# Altium PCB DONGLE01.PcbDoc
Units mil, origin at the board's own origin, x right, y up, seen from the top; angles counter-clockwise.
Board outline 2209.86 x 653 mil, 2 copper layers (Top Layer, Bottom Layer), stack 41.756 mil thick; 36 components, 27 nets, 137 pads, 53 vias.
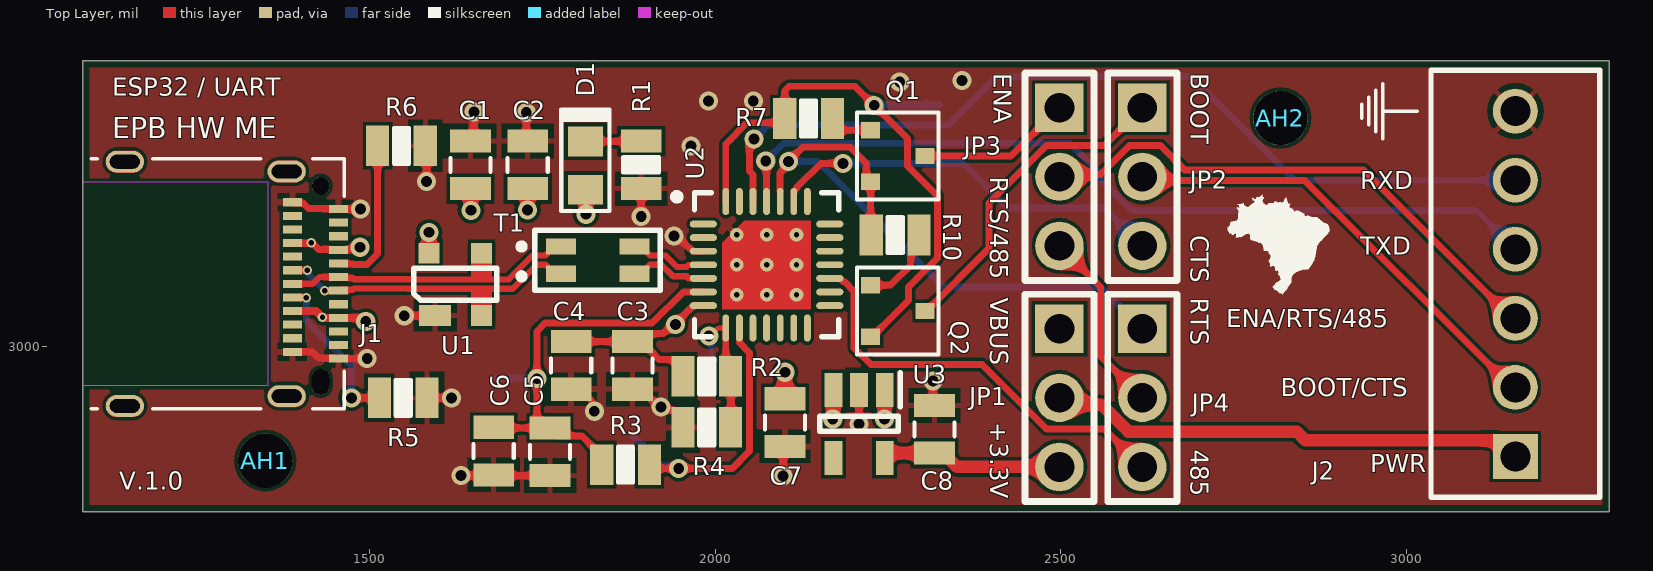
[diagram p0: Top Layer view]
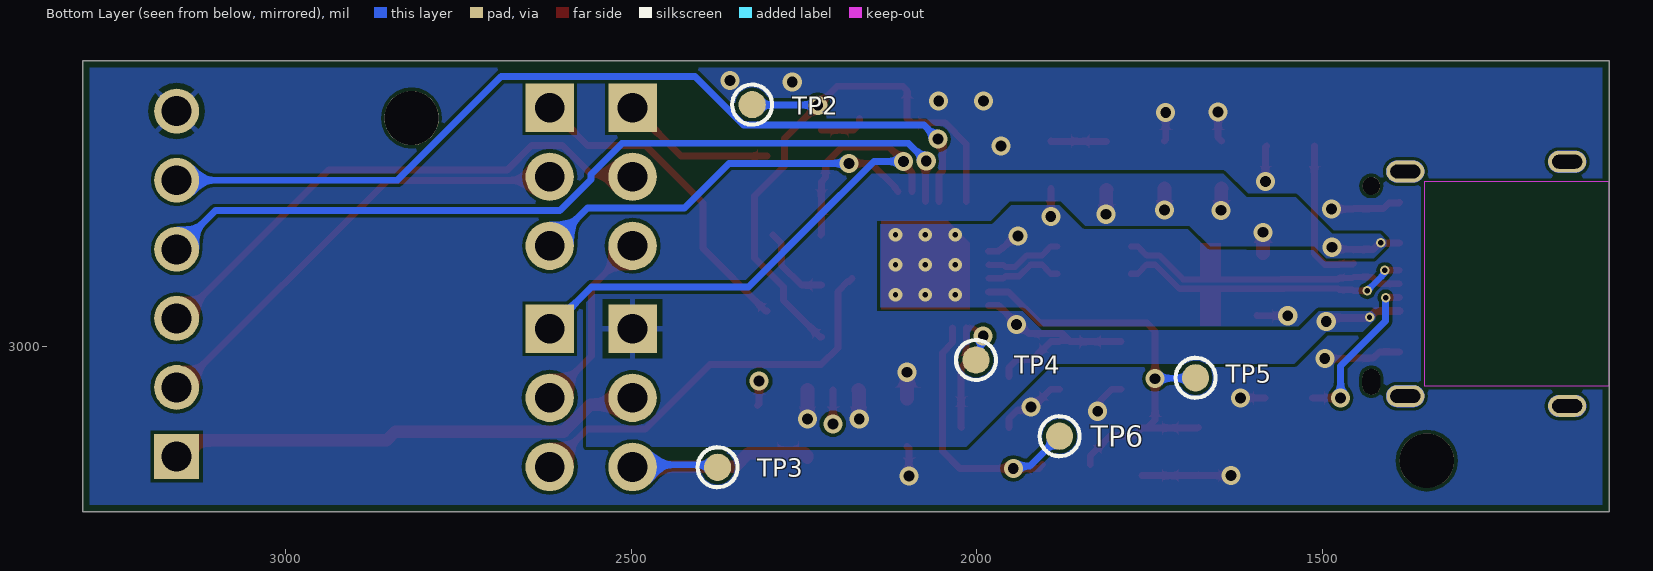
[diagram p1: Bottom Layer view, seen from below]
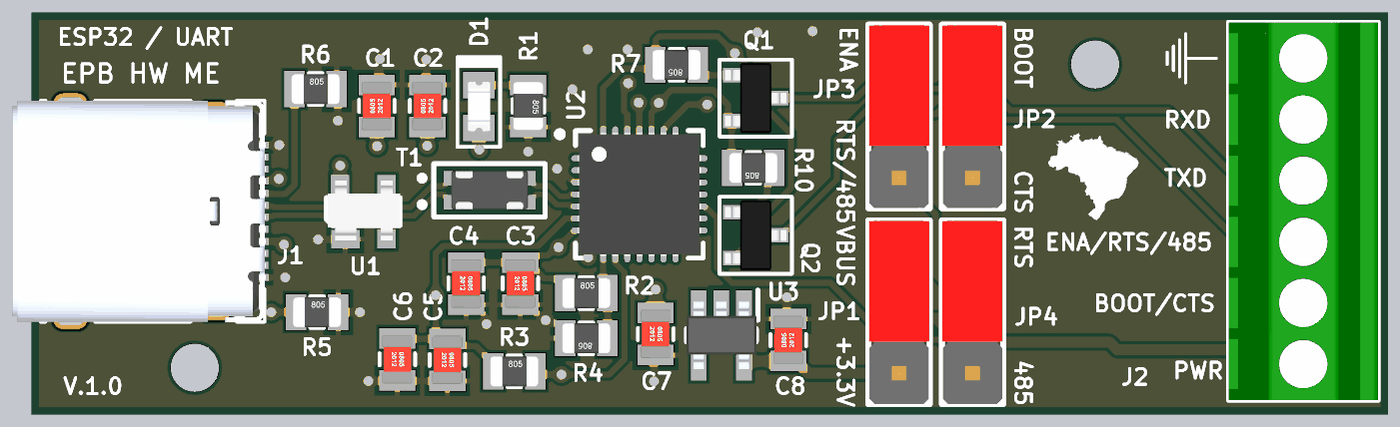
[diagram p2: 3D render of the assembled board from above, using the file's embedded part models]

## Layer stack, top to bottom
Top Solder: solder mask 1, SM-001, Dk 4
Top Layer: signal copper 1.378
Dielectric 1: core 39, Core-042, Dk 4.6
Bottom Layer: signal copper 1.378
Bottom Solder: solder mask 1, SM-001, Dk 4

## Board outline
1084.25,2760.55 1084.25,3413.55 3294.11,3413.55 3294.11,2760.55

## Design rules (kind name [scope] priority, off if disabled: settings)
BoardOutlineClearance [All] p1: gap=10 ignorepadtopadclearanceinfootprint=FALSE
Clearance [not InNetClass('USBI') and not InNetClass('USBE')] p1: gap=5 ignorepadtopadclearanceinfootprint=TRUE
DiffPairsRouting "Schematic Differential Pairs Routing_4" [InNetClass('USBI')] p1: maxlimit=4.51 minlimit=4.51 mostfreqgap=4.51 toplayer_minwidth=9 toplayer_maxwidth=9 toplayer_prefwidth=9 bottomlayer_minwidth=9 bottomlayer_maxwidth=9 bottomlayer_prefwidth=9 impedanceprofiledriven=TRUE impedanceprofileid={0D77AD79-8F11-46E1-93D8-ED229D89D16F} impedanceprofilevalue=90.000000 maxuncoupledlength=2000
DiffPairsRouting "Schematic Differential Pairs Routing_3" [InNetClass('USBE')] p2: maxlimit=4.51 minlimit=4.51 mostfreqgap=4.51 toplayer_minwidth=9 toplayer_maxwidth=9 toplayer_prefwidth=9 bottomlayer_minwidth=9 bottomlayer_maxwidth=9 bottomlayer_prefwidth=9 impedanceprofiledriven=TRUE impedanceprofileid={0D77AD79-8F11-46E1-93D8-ED229D89D16F} impedanceprofilevalue=90.000000 maxuncoupledlength=500
DiffPairsRouting [All] p3: maxlimit=10 minlimit=10 mostfreqgap=10 toplayer_minwidth=15 toplayer_maxwidth=15 toplayer_prefwidth=15 bottomlayer_minwidth=15 bottomlayer_maxwidth=15 bottomlayer_prefwidth=15 maxuncoupledlength=500
MatchedLengths "Schematic Matched Net Lengths_3" [InNetClass('USBI')] p1: tolerance=1000 checknetsindiffpair=TRUE checkdiffpairvsdiffpair=FALSE checkxsignals=FALSE checkothers=FALSE usedelayunits=TRUE delaytolerance=100.000000
MatchedLengths "Schematic Matched Net Lengths_2" [InNetClass('USBE')] p2: tolerance=1000 checknetsindiffpair=TRUE checkdiffpairvsdiffpair=FALSE checkxsignals=FALSE checkothers=FALSE usedelayunits=TRUE delaytolerance=100.000000
MinimumSolderMaskSliver [not InComponent('J1') and not InComponent('U2')] p1: minsoldermaskwidth=6
PolygonConnect [All] p1: thpad.connectstyle=Relief thpad.reliefconductorwidth=8 thpad.reliefentries=4 thpad.polygonreliefangle="90 Angle" thpad.airgapwidth=8 thpad.conductorbypadedge=TRUE thpad.mindistance=15 thpad.enablemindistance=FALSE smdpad.connectstyle=Relief smdpad.reliefconductorwidth=8 smdpad.reliefentries=4 smdpad.polygonreliefangle="90 Angle" smdpad.airgapwidth=8 smdpad.conductorbypadedge=TRUE smdpad.mindistance=15 smdpad.enablemindistance=FALSE via.connectstyle=Direct via.reliefconductorwidth=8 via.reliefentries=4 via.polygonreliefangle="90 Angle" via.airgapwidth=8
RoutingVias [All] p1: holewidth=15.75 width=27.56 viastyle="Through Hole" minholewidth=7.87 minwidth=13.78 maxholewidth=39.37 maxwidth=196.85
SilkToSolderMaskClearance [IsPad] p1: minsilkscreentomaskgap=1 clearancetoexposedcopper=FALSE
SolderMaskExpansion Via [IsVia] p1: expansion=4 istentingtop=TRUE
SolderMaskExpansion Generic [All] p2: expansion=1 istentingtop=FALSE
SupplyNets "Schematic Supply Nets_4" [InNet('+3.3V')] p1: voltage=0.000
SupplyNets "Schematic Supply Nets_2" [InNet('GND')] p2: voltage=0.000
SupplyNets "Schematic Supply Nets_1" [InNet('VBUS')] p3: voltage=0.000
SupplyNets "Schematic Supply Nets" [InNet('CP2102VDD')] p4: voltage=0.000
UnRoutedNet [All] p1: checkbadconnections=TRUE
Width [All] p1: maxlimit=50 minlimit=3.94 preferedwidth=10
26 further rules are at their usual default settings.

## Classes and differential pairs
net class USBI: DI_N DI_P
net class USBE: DE_N DE_P
differential pair DI: +DI_P -DI_N
differential pair DE: +DE_P -DE_N

## Components (designator, comment, footprint, x,y, rotation, side; value= is the part's Value field where it differs from the comment)
AH1 "Furo de Alinhamento" AH_2.0MMD 1348.43,2834.65 r0 top
AH2 "Furo de Alinhamento" AH_2.0MMD 2818.11,3330.55 r0 top
C1 "47uF" C0805 1645.67,3262.8 r180 top
C2 "47uF" C0805 1728.35,3262.8 r180 top
C3 "4.7uF" C0805 1879.92,2972.44 r0 top
C4 "0.1uF" C0805 1791.34,2972.44 r0 top
C5 "4.7uF" C0805 1760.83,2847.44 r0 top
C6 "0.1uF" C0805 1679.13,2848.43 r0 top
C7 "1uF" C0805 2100.79,2889.76 r0 top
C8 "2.2uF" C0805 2317.32,2879.92 r180 top
D1 "Blue Led 0805" "LED 0805" 1812.01,3261.81 r270 top
J1 "12401598E4#2A" AMPHENOL_12401598E4#2A 1428.74,3090.55 r270 top value="CONN RCP USB3.1 TYPEC 24P SMD RA"
J2 "MPT 0,5/ 6-2,54" 1725698 3158.11,2840.55 r90 top
JP1 "Header 3 Pin" JMP-3-PTH-180 2498.11,2925.55 r270 top
JP2 "Header 3 Pin" JMP-3-PTH-180 2618.11,3245.55 r270 top
JP3 "Header 3 Pin" JMP-3-PTH-180 2498.11,3245.55 r270 top
JP4 "Header 3 Pin" JMP-3-PTH-180 2618.11,2925.55 r270 top
Q1 "BSS64LT1G" SOT-23 2264.17,3275.59 r270 top
Q2 "BSS64LT1G" SOT-23 2264.17,3051.18 r270 top
R1 "180R" R0805 1892.72,3262.8 r0 top
R2 "21K" R0805 1987.6,2956.69 r90 top
R3 "1K07" R0805 1870.08,2828.74 r90 top
R4 "48K7" R0805 1987.6,2882.87 r270 top
R5 "5K1" R0805 1548.11,2925.55 r90 top
R6 "5K1" R0805 1545.71,3290.34 r90 top
R7 "10K" R0805 2135,3330 r270 top
R10 "10K" R0805 2260.24,3161.42 r270 top
T1 "CMC 370MA 2LN 90OHM SMD AEC-Q200" 744232090 1829.72,3125 r0 top
TP2 "" TP 2325,3350 r180 bottom
TP3 "" TP 2375,2825 r180 bottom
TP4 "" TP 2000.98,2980.32 r180 bottom
TP5 "" TP 1683.11,2954.55 r180 bottom
TP6 "" TP 1880,2870 r180 bottom
U1 "USB ESD protection" SOT143-4 1623.41,3089.87 r90 top
U2 "CP2102N-A02-GQFN28R" "QFN50P500X500X80_HS-29N CP2102N" 2074.21,3118.11 r0 top
U3 "3.3V 600mA PMIC" SOT94P280X100-5N 2208.07,2887.8 r270 top

## Footprints (in the part's own frame and the unit in brackets; to place one, negate y for a bottom-side part, rotate by r counter-clockwise, add the part's x,y. Pads: shape width x height; smd on the part's side, far side on the other; paste and mask are expansions set on the pad)
1725698 [mm]
  rect 1.65x1.65 hole 1.1: 1(0,0)
  round 1.65 hole 1.1: 2(2.54,0) 3(5.08,0) 4(7.62,0) 5(10.16,0) 6(12.7,0)
  silkscreen extent -1.5,-3.1 14.2,3.1, body extent -1.5,-3.1 14.2,3.1, height 8.61
744232090 [mm] "WURTH EMI FILTER 1206"
  rect 1.1x0.6 smd: 1(-1.35,-0.5) 2(1.35,-0.5) 3(1.35,0.5) 4(-1.35,0.5)
  silkscreen extent -2.9,-1.11 2.3,1.1, body extent -1.6,-0.8 1.6,0.8, height 1.15
AH_2.0MMD [mm] "Alignment Hole M2"
  round 2 hole 2 unplated: 1(0,0)
AMPHENOL_12401598E4#2A [mm] "Type-C SMD Receptacle"
  rect 0.3x0.7 smd: A1(-2.75,0.66) A2(-2.25,0.66) A3(-1.75,0.66) A4(-1.25,0.66) A5(-0.75,0.66) A6(-0.25,0.66) A7(0.25,0.66) A8(0.75,0.66) A9(1.25,0.66) A10(1.75,0.66) A11(2.25,0.66) A12(2.75,0.66) B1(2.5,-1.04) B2(2,-1.04) B3(1.5,-1.04) B4(1,-1.04) B5(0.5,-1.04) B6(0,-1.04) B7(-0.5,-1.04) B8(-1,-1.04) B9(-1.5,-1.04) B10(-2,-1.04) B11(-2.5,-1.04) B12(-3,-1.04)
  oval 0.8x1.4 hole 0.5 slot 1.1 at 90 deg paste-2539.97 mask+0.05: SH1(-4.13,-1.25) SH2(-4.49,-7.2) SH3(4.49,-7.2) SH4(4.13,-1.25)
  round 0.65 hole 0.65 unplated: ""(-3.6,0)
  oval 0.95x0.65 hole 0.65 slot 0.95 at 0 deg unplated: ""(3.6,0)
  Top Layer region: 4.511,-6.501 4.532,-6.502 4.553,-6.505 4.573,-6.509 4.594,-6.514 4.614,-6.52 4.633,-6.527 4.653,-6.535 4.672,-6.544 4.69,-6.554 4.708,-6.565 4.725,-6.576 4.742,-6.589 4.758,-6.603 4.773,-6.617 4.787,-6.632 4.801,-6.648 4.814,-6.665 4.825,-6.682 4.836,-6.7 4.846,-6.718 4.855,-6.737 4.863,-6.757 4.87,-6.776 4.876,-6.796 4.881,-6.817 4.885,-6.837 4.888,-6.858 4.889,-6.879 4.89,-6.9 4.89,-7.5 4.889,-7.521 4.888,-7.542 4.885,-7.563 4.881,-7.583 4.876,-7.604 4.87,-7.624 4.863,-7.643 4.855,-7.663 4.846,-7.682 4.836,-7.7 4.825,-7.718 4.814,-7.735 4.801,-7.752 4.787,-7.768 4.773,-7.783 4.758,-7.797 4.742,-7.811 4.725,-7.824 4.708,-7.835 4.69,-7.846 4.672,-7.856 4.653,-7.865 4.633,-7.873 4.614,-7.88 4.594,-7.886 4.573,-7.891 4.553,-7.895 4.532,-7.898 4.511,-7.899 4.49,-7.9 4.469,-7.899 4.448,-7.898 4.427,-7.895 4.407,-7.891 4.386,-7.886 4.366,-7.88 4.347,-7.873 4.327,-7.865 4.308,-7.856 4.29,-7.846 4.272,-7.835 4.255,-7.824 4.238,-7.811 4.222,-7.797 4.207,-7.783 4.193,-7.768 4.179,-7.752 4.166,-7.735 4.155,-7.718 4.144,-7.7 4.134,-7.682 4.125,-7.663 4.117,-7.643 4.11,-7.624 4.104,-7.604 4.099,-7.583 4.095,-7.563 4.092,-7.542 4.091,-7.521 4.09,-7.5 4.09,-6.9 4.091,-6.879 4.092,-6.858 4.095,-6.837 4.099,-6.817 4.104,-6.796 4.11,-6.776 4.117,-6.757 4.125,-6.737 4.134,-6.718 4.144,-6.7 4.155,-6.682 4.166,-6.665 4.179,-6.648 4.193,-6.632 4.207,-6.617 4.222,-6.603 4.238,-6.589 4.255,-6.576 4.272,-6.565 4.29,-6.554 4.308,-6.544 4.327,-6.535 4.347,-6.527 4.366,-6.52 4.386,-6.514 4.407,-6.509 4.427,-6.505 4.448,-6.502 4.469,-6.501 4.49,-6.5
  Top Layer region: -4.469,-6.501 -4.448,-6.502 -4.427,-6.505 -4.407,-6.509 -4.386,-6.514 -4.366,-6.52 -4.347,-6.527 -4.327,-6.535 -4.308,-6.544 -4.29,-6.554 -4.272,-6.565 -4.255,-6.576 -4.238,-6.589 -4.222,-6.603 -4.207,-6.617 -4.193,-6.632 -4.179,-6.648 -4.166,-6.665 -4.155,-6.682 -4.144,-6.7 -4.134,-6.718 -4.125,-6.737 -4.117,-6.757 -4.11,-6.776 -4.104,-6.796 -4.099,-6.817 -4.095,-6.837 -4.092,-6.858 -4.091,-6.879 -4.09,-6.9 -4.09,-7.5 -4.091,-7.521 -4.092,-7.542 -4.095,-7.563 -4.099,-7.583 -4.104,-7.604 -4.11,-7.624 -4.117,-7.643 -4.125,-7.663 -4.134,-7.682 -4.144,-7.7 -4.155,-7.718 -4.166,-7.735 -4.179,-7.752 -4.193,-7.768 -4.207,-7.783 -4.222,-7.797 -4.238,-7.811 -4.255,-7.824 -4.272,-7.835 -4.29,-7.846 -4.308,-7.856 -4.327,-7.865 -4.347,-7.873 -4.366,-7.88 -4.386,-7.886 -4.407,-7.891 -4.427,-7.895 -4.448,-7.898 -4.469,-7.899 -4.49,-7.9 -4.511,-7.899 -4.532,-7.898 -4.553,-7.895 -4.573,-7.891 -4.594,-7.886 -4.614,-7.88 -4.633,-7.873 -4.653,-7.865 -4.672,-7.856 -4.69,-7.846 -4.708,-7.835 -4.725,-7.824 -4.742,-7.811 -4.758,-7.797 -4.773,-7.783 -4.787,-7.768 -4.801,-7.752 -4.814,-7.735 -4.825,-7.718 -4.836,-7.7 -4.846,-7.682 -4.855,-7.663 -4.863,-7.643 -4.87,-7.624 -4.876,-7.604 -4.881,-7.583 -4.885,-7.563 -4.888,-7.542 -4.889,-7.521 -4.89,-7.5 -4.89,-6.9 -4.889,-6.879 -4.888,-6.858 -4.885,-6.837 -4.881,-6.817 -4.876,-6.796 -4.87,-6.776 -4.863,-6.757 -4.855,-6.737 -4.846,-6.718 -4.836,-6.7 -4.825,-6.682 -4.814,-6.665 -4.801,-6.648 -4.787,-6.632 -4.773,-6.617 -4.758,-6.603 -4.742,-6.589 -4.725,-6.576 -4.708,-6.565 -4.69,-6.554 -4.672,-6.544 -4.653,-6.535 -4.633,-6.527 -4.614,-6.52 -4.594,-6.514 -4.573,-6.509 -4.553,-6.505 -4.532,-6.502 -4.511,-6.501 -4.49,-6.5
  Top Layer region: 4.151,-0.551 4.172,-0.552 4.193,-0.555 4.213,-0.559 4.234,-0.564 4.254,-0.57 4.273,-0.577 4.293,-0.585 4.312,-0.594 4.33,-0.604 4.348,-0.615 4.365,-0.626 4.382,-0.639 4.398,-0.653 4.413,-0.667 4.427,-0.682 4.441,-0.698 4.454,-0.715 4.465,-0.732 4.476,-0.75 4.486,-0.768 4.495,-0.787 4.503,-0.807 4.51,-0.826 4.516,-0.846 4.521,-0.867 4.525,-0.887 4.528,-0.908 4.529,-0.929 4.53,-0.95 4.53,-1.55 4.529,-1.571 4.528,-1.592 4.525,-1.613 4.521,-1.633 4.516,-1.654 4.51,-1.674 4.503,-1.693 4.495,-1.713 4.486,-1.732 4.476,-1.75 4.465,-1.768 4.454,-1.785 4.441,-1.802 4.427,-1.818 4.413,-1.833 4.398,-1.847 4.382,-1.861 4.365,-1.874 4.348,-1.885 4.33,-1.896 4.312,-1.906 4.293,-1.915 4.273,-1.923 4.254,-1.93 4.234,-1.936 4.213,-1.941 4.193,-1.945 4.172,-1.948 4.151,-1.949 4.13,-1.95 4.109,-1.949 4.088,-1.948 4.067,-1.945 4.047,-1.941 4.026,-1.936 4.006,-1.93 3.987,-1.923 3.967,-1.915 3.948,-1.906 3.93,-1.896 3.912,-1.885 3.895,-1.874 3.878,-1.861 3.862,-1.847 3.847,-1.833 3.833,-1.818 3.819,-1.802 3.806,-1.785 3.795,-1.768 3.784,-1.75 3.774,-1.732 3.765,-1.713 3.757,-1.693 3.75,-1.674 3.744,-1.654 3.739,-1.633 3.735,-1.613 3.732,-1.592 3.731,-1.571 3.73,-1.55 3.73,-0.95 3.731,-0.929 3.732,-0.908 3.735,-0.887 3.739,-0.867 3.744,-0.846 3.75,-0.826 3.757,-0.807 3.765,-0.787 3.774,-0.768 3.784,-0.75 3.795,-0.732 3.806,-0.715 3.819,-0.698 3.833,-0.682 3.847,-0.667 3.862,-0.653 3.878,-0.639 3.895,-0.626 3.912,-0.615 3.93,-0.604 3.948,-0.594 3.967,-0.585 3.987,-0.577 4.006,-0.57 4.026,-0.564 4.047,-0.559 4.067,-0.555 4.088,-0.552 4.109,-0.551 4.13,-0.55
  Top Layer region: -4.109,-0.551 -4.088,-0.552 -4.067,-0.555 -4.047,-0.559 -4.026,-0.564 -4.006,-0.57 -3.987,-0.577 -3.967,-0.585 -3.948,-0.594 -3.93,-0.604 -3.912,-0.615 -3.895,-0.626 -3.878,-0.639 -3.862,-0.653 -3.847,-0.667 -3.833,-0.682 -3.819,-0.698 -3.806,-0.715 -3.795,-0.732 -3.784,-0.75 -3.774,-0.768 -3.765,-0.787 -3.757,-0.807 -3.75,-0.826 -3.744,-0.846 -3.739,-0.867 -3.735,-0.887 -3.732,-0.908 -3.731,-0.929 -3.73,-0.95 -3.73,-1.25 -3.73,-1.55 -3.731,-1.571 -3.732,-1.592 -3.735,-1.613 -3.739,-1.633 -3.744,-1.654 -3.75,-1.674 -3.757,-1.693 -3.765,-1.713 -3.774,-1.732 -3.784,-1.75 -3.795,-1.768 -3.806,-1.785 -3.819,-1.802 -3.833,-1.818 -3.847,-1.833 -3.862,-1.847 -3.878,-1.861 -3.895,-1.874 -3.912,-1.885 -3.93,-1.896 -3.948,-1.906 -3.967,-1.915 -3.987,-1.923 -4.006,-1.93 -4.026,-1.936 -4.047,-1.941 -4.067,-1.945 -4.088,-1.948 -4.109,-1.949 -4.13,-1.95 -4.151,-1.949 -4.172,-1.948 -4.193,-1.945 -4.213,-1.941 -4.234,-1.936 -4.254,-1.93 -4.273,-1.923 -4.293,-1.915 -4.312,-1.906 -4.33,-1.896 -4.348,-1.885 -4.365,-1.874 -4.382,-1.861 -4.398,-1.847 -4.413,-1.833 -4.427,-1.818 -4.441,-1.802 -4.454,-1.785 -4.465,-1.768 -4.476,-1.75 -4.486,-1.732 -4.495,-1.713 -4.503,-1.693 -4.51,-1.674 -4.516,-1.654 -4.521,-1.633 -4.525,-1.613 -4.528,-1.592 -4.529,-1.571 -4.53,-1.55 -4.53,-1.25 -4.53,-0.95 -4.529,-0.929 -4.528,-0.908 -4.525,-0.887 -4.521,-0.867 -4.516,-0.846 -4.51,-0.826 -4.503,-0.807 -4.495,-0.787 -4.486,-0.768 -4.476,-0.75 -4.465,-0.732 -4.454,-0.715 -4.441,-0.698 -4.427,-0.682 -4.413,-0.667 -4.398,-0.653 -4.382,-0.639 -4.365,-0.626 -4.348,-0.615 -4.33,-0.604 -4.312,-0.594 -4.293,-0.585 -4.273,-0.577 -4.254,-0.57 -4.234,-0.564 -4.213,-0.559 -4.193,-0.555 -4.172,-0.552 -4.151,-0.551 -4.13,-0.55
  Bottom Layer region: 4.511,-6.501 4.532,-6.502 4.553,-6.505 4.573,-6.509 4.594,-6.514 4.614,-6.52 4.633,-6.527 4.653,-6.535 4.672,-6.544 4.69,-6.554 4.708,-6.565 4.725,-6.576 4.742,-6.589 4.758,-6.603 4.773,-6.617 4.787,-6.632 4.801,-6.648 4.814,-6.665 4.825,-6.682 4.836,-6.7 4.846,-6.718 4.855,-6.737 4.863,-6.757 4.87,-6.776 4.876,-6.796 4.881,-6.817 4.885,-6.837 4.888,-6.858 4.889,-6.879 4.89,-6.9 4.89,-7.5 4.889,-7.521 4.888,-7.542 4.885,-7.563 4.881,-7.583 4.876,-7.604 4.87,-7.624 4.863,-7.643 4.855,-7.663 4.846,-7.682 4.836,-7.7 4.825,-7.718 4.814,-7.735 4.801,-7.752 4.787,-7.768 4.773,-7.783 4.758,-7.797 4.742,-7.811 4.725,-7.824 4.708,-7.835 4.69,-7.846 4.672,-7.856 4.653,-7.865 4.633,-7.873 4.614,-7.88 4.594,-7.886 4.573,-7.891 4.553,-7.895 4.532,-7.898 4.511,-7.899 4.49,-7.9 4.469,-7.899 4.448,-7.898 4.427,-7.895 4.407,-7.891 4.386,-7.886 4.366,-7.88 4.347,-7.873 4.327,-7.865 4.308,-7.856 4.29,-7.846 4.272,-7.835 4.255,-7.824 4.238,-7.811 4.222,-7.797 4.207,-7.783 4.193,-7.768 4.179,-7.752 4.166,-7.735 4.155,-7.718 4.144,-7.7 4.134,-7.682 4.125,-7.663 4.117,-7.643 4.11,-7.624 4.104,-7.604 4.099,-7.583 4.095,-7.563 4.092,-7.542 4.091,-7.521 4.09,-7.5 4.09,-6.9 4.091,-6.879 4.092,-6.858 4.095,-6.837 4.099,-6.817 4.104,-6.796 4.11,-6.776 4.117,-6.757 4.125,-6.737 4.134,-6.718 4.144,-6.7 4.155,-6.682 4.166,-6.665 4.179,-6.648 4.193,-6.632 4.207,-6.617 4.222,-6.603 4.238,-6.589 4.255,-6.576 4.272,-6.565 4.29,-6.554 4.308,-6.544 4.327,-6.535 4.347,-6.527 4.366,-6.52 4.386,-6.514 4.407,-6.509 4.427,-6.505 4.448,-6.502 4.469,-6.501 4.49,-6.5
  Bottom Layer region: -4.469,-6.501 -4.448,-6.502 -4.427,-6.505 -4.407,-6.509 -4.386,-6.514 -4.366,-6.52 -4.347,-6.527 -4.327,-6.535 -4.308,-6.544 -4.29,-6.554 -4.272,-6.565 -4.255,-6.576 -4.238,-6.589 -4.222,-6.603 -4.207,-6.617 -4.193,-6.632 -4.179,-6.648 -4.166,-6.665 -4.155,-6.682 -4.144,-6.7 -4.134,-6.718 -4.125,-6.737 -4.117,-6.757 -4.11,-6.776 -4.104,-6.796 -4.099,-6.817 -4.095,-6.837 -4.092,-6.858 -4.091,-6.879 -4.09,-6.9 -4.09,-7.5 -4.091,-7.521 -4.092,-7.542 -4.095,-7.563 -4.099,-7.583 -4.104,-7.604 -4.11,-7.624 -4.117,-7.643 -4.125,-7.663 -4.134,-7.682 -4.144,-7.7 -4.155,-7.718 -4.166,-7.735 -4.179,-7.752 -4.193,-7.768 -4.207,-7.783 -4.222,-7.797 -4.238,-7.811 -4.255,-7.824 -4.272,-7.835 -4.29,-7.846 -4.308,-7.856 -4.327,-7.865 -4.347,-7.873 -4.366,-7.88 -4.386,-7.886 -4.407,-7.891 -4.427,-7.895 -4.448,-7.898 -4.469,-7.899 -4.49,-7.9 -4.511,-7.899 -4.532,-7.898 -4.553,-7.895 -4.573,-7.891 -4.594,-7.886 -4.614,-7.88 -4.633,-7.873 -4.653,-7.865 -4.672,-7.856 -4.69,-7.846 -4.708,-7.835 -4.725,-7.824 -4.742,-7.811 -4.758,-7.797 -4.773,-7.783 -4.787,-7.768 -4.801,-7.752 -4.814,-7.735 -4.825,-7.718 -4.836,-7.7 -4.846,-7.682 -4.855,-7.663 -4.863,-7.643 -4.87,-7.624 -4.876,-7.604 -4.881,-7.583 -4.885,-7.563 -4.888,-7.542 -4.889,-7.521 -4.89,-7.5 -4.89,-6.9 -4.889,-6.879 -4.888,-6.858 -4.885,-6.837 -4.881,-6.817 -4.876,-6.796 -4.87,-6.776 -4.863,-6.757 -4.855,-6.737 -4.846,-6.718 -4.836,-6.7 -4.825,-6.682 -4.814,-6.665 -4.801,-6.648 -4.787,-6.632 -4.773,-6.617 -4.758,-6.603 -4.742,-6.589 -4.725,-6.576 -4.708,-6.565 -4.69,-6.554 -4.672,-6.544 -4.653,-6.535 -4.633,-6.527 -4.614,-6.52 -4.594,-6.514 -4.573,-6.509 -4.553,-6.505 -4.532,-6.502 -4.511,-6.501 -4.49,-6.5
  Bottom Layer region: 4.151,-0.551 4.172,-0.552 4.193,-0.555 4.213,-0.559 4.234,-0.564 4.254,-0.57 4.273,-0.577 4.293,-0.585 4.312,-0.594 4.33,-0.604 4.348,-0.615 4.365,-0.626 4.382,-0.639 4.398,-0.653 4.413,-0.667 4.427,-0.682 4.441,-0.698 4.454,-0.715 4.465,-0.732 4.476,-0.75 4.486,-0.768 4.495,-0.787 4.503,-0.807 4.51,-0.826 4.516,-0.846 4.521,-0.867 4.525,-0.887 4.528,-0.908 4.529,-0.929 4.53,-0.95 4.53,-1.55 4.529,-1.571 4.528,-1.592 4.525,-1.613 4.521,-1.633 4.516,-1.654 4.51,-1.674 4.503,-1.693 4.495,-1.713 4.486,-1.732 4.476,-1.75 4.465,-1.768 4.454,-1.785 4.441,-1.802 4.427,-1.818 4.413,-1.833 4.398,-1.847 4.382,-1.861 4.365,-1.874 4.348,-1.885 4.33,-1.896 4.312,-1.906 4.293,-1.915 4.273,-1.923 4.254,-1.93 4.234,-1.936 4.213,-1.941 4.193,-1.945 4.172,-1.948 4.151,-1.949 4.13,-1.95 4.109,-1.949 4.088,-1.948 4.067,-1.945 4.047,-1.941 4.026,-1.936 4.006,-1.93 3.987,-1.923 3.967,-1.915 3.948,-1.906 3.93,-1.896 3.912,-1.885 3.895,-1.874 3.878,-1.861 3.862,-1.847 3.847,-1.833 3.833,-1.818 3.819,-1.802 3.806,-1.785 3.795,-1.768 3.784,-1.75 3.774,-1.732 3.765,-1.713 3.757,-1.693 3.75,-1.674 3.744,-1.654 3.739,-1.633 3.735,-1.613 3.732,-1.592 3.731,-1.571 3.73,-1.55 3.73,-0.95 3.731,-0.929 3.732,-0.908 3.735,-0.887 3.739,-0.867 3.744,-0.846 3.75,-0.826 3.757,-0.807 3.765,-0.787 3.774,-0.768 3.784,-0.75 3.795,-0.732 3.806,-0.715 3.819,-0.698 3.833,-0.682 3.847,-0.667 3.862,-0.653 3.878,-0.639 3.895,-0.626 3.912,-0.615 3.93,-0.604 3.948,-0.594 3.967,-0.585 3.987,-0.577 4.006,-0.57 4.026,-0.564 4.047,-0.559 4.067,-0.555 4.088,-0.552 4.109,-0.551 4.13,-0.55
  Bottom Layer region: -4.109,-0.551 -4.088,-0.552 -4.067,-0.555 -4.047,-0.559 -4.026,-0.564 -4.006,-0.57 -3.987,-0.577 -3.967,-0.585 -3.948,-0.594 -3.93,-0.604 -3.912,-0.615 -3.895,-0.626 -3.878,-0.639 -3.862,-0.653 -3.847,-0.667 -3.833,-0.682 -3.819,-0.698 -3.806,-0.715 -3.795,-0.732 -3.784,-0.75 -3.774,-0.768 -3.765,-0.787 -3.757,-0.807 -3.75,-0.826 -3.744,-0.846 -3.739,-0.867 -3.735,-0.887 -3.732,-0.908 -3.731,-0.929 -3.73,-0.95 -3.73,-1.55 -3.731,-1.571 -3.732,-1.592 -3.735,-1.613 -3.739,-1.633 -3.744,-1.654 -3.75,-1.674 -3.757,-1.693 -3.765,-1.713 -3.774,-1.732 -3.784,-1.75 -3.795,-1.768 -3.806,-1.785 -3.819,-1.802 -3.833,-1.818 -3.847,-1.833 -3.862,-1.847 -3.878,-1.861 -3.895,-1.874 -3.912,-1.885 -3.93,-1.896 -3.948,-1.906 -3.967,-1.915 -3.987,-1.923 -4.006,-1.93 -4.026,-1.936 -4.047,-1.941 -4.067,-1.945 -4.088,-1.948 -4.109,-1.949 -4.13,-1.95 -4.151,-1.949 -4.172,-1.948 -4.193,-1.945 -4.213,-1.941 -4.234,-1.936 -4.254,-1.93 -4.273,-1.923 -4.293,-1.915 -4.312,-1.906 -4.33,-1.896 -4.348,-1.885 -4.365,-1.874 -4.382,-1.861 -4.398,-1.847 -4.413,-1.833 -4.427,-1.818 -4.441,-1.802 -4.454,-1.785 -4.465,-1.768 -4.476,-1.75 -4.486,-1.732 -4.495,-1.713 -4.503,-1.693 -4.51,-1.674 -4.516,-1.654 -4.521,-1.633 -4.525,-1.613 -4.528,-1.592 -4.529,-1.571 -4.53,-1.55 -4.53,-0.95 -4.529,-0.929 -4.528,-0.908 -4.525,-0.887 -4.521,-0.867 -4.516,-0.846 -4.51,-0.826 -4.503,-0.807 -4.495,-0.787 -4.486,-0.768 -4.476,-0.75 -4.465,-0.732 -4.454,-0.715 -4.441,-0.698 -4.427,-0.682 -4.413,-0.667 -4.398,-0.653 -4.382,-0.639 -4.365,-0.626 -4.348,-0.615 -4.33,-0.604 -4.312,-0.594 -4.293,-0.585 -4.273,-0.577 -4.254,-0.57 -4.234,-0.564 -4.213,-0.559 -4.193,-0.555 -4.172,-0.552 -4.151,-0.551 -4.13,-0.55
  Keep-Out Layer region: 3.75,-8.75 -3.75,-8.75 -3.75,-1.95 3.75,-1.95
  silkscreen extent -4.6,-8.43 4.6,0.86, body extent -4.6,-9.59 4.6,0.9, height 3.29
C0805 [mm]
  rect 1.5x0.85 smd mask+0.05: 1(0,0.875) 2(0,-0.875)
  silkscreen extent -0.74,-0.25 0.74,0.25, body extent -0.62,-1 0.63,1, height 0.9
JMP-3-PTH-180 [mil] "Jumper 3 pinos PTH 180º passo 2.54mm"
  rect 70x70 hole 43: 1(-100,0)
  round 70 hole 43: 2(0,0) 3(100,0)
  silkscreen extent -150,-50 150,50, body extent -150,-49 150,49, height 323
"LED 0805" [mm]
  rect 1.1x1.3 smd mask+0.051: A(0.889,0) K(-0.889,0)
  silkscreen extent -2.06,-0.89 1.68,0.89, body extent -1.03,-0.44 1.03,0.47, height 0.85
"QFN50P500X500X80_HS-29N CP2102N" [mm] "QFN, 28-Leads, Body 5,00x5,00mm, Pitch 0,50mm, Thermal Pad 3,25x3,25mm, IPC Medium Density"
  oval 1x0.25 smd: 1(-2.325,1.5) 2(-2.325,1) 3(-2.325,0.5) 4(-2.325,0) 5(-2.325,-0.5) 6(-2.325,-1) 7(-2.325,-1.5) 15(2.325,-1.5) 16(2.325,-1) 17(2.325,-0.5) 18(2.325,0) 19(2.325,0.5) 20(2.325,1) 21(2.325,1.5)
  oval 0.25x1 smd: 8(-1.5,-2.325) 9(-1,-2.325) 10(-0.5,-2.325) 11(0,-2.325) 12(0.5,-2.325) 13(1,-2.325) 14(1.5,-2.325) 22(1.5,2.325) 23(1,2.325) 24(0.5,2.325) 25(0,2.325) 26(-0.5,2.325) 27(-1,2.325) 28(-1.5,2.325)
  round 0.025 smd: 29(0,0)
  Top Layer region: -1.625,-1.625 -1.625,0.813 -0.813,1.625 1.625,1.625 1.625,-1.625
  silkscreen extent -3.42,-2.65 2.65,2.65, body extent -2.55,-2.55 2.55,2.55, height 0.8
R0805 [mm]
  rect 1.5x0.85 smd mask+0.05: 1(0,0.875) 2(0,-0.875)
  silkscreen extent -0.66,-0.28 0.66,0.28, body extent -0.62,-1 0.63,1, height 0.78
SOT94P280X100-5N [mm]
  rect 1.25x0.65 smd: 1(-1.25,0.94) 2(-1.25,0) 3(-1.25,-0.94) 4(1.25,-0.94) 5(1.25,0.94)
  silkscreen extent -1.88,-1.45 0.28,1.51, body extent -1.4,-1.45 1.4,1.45, height 1
SOT143-4 [mil]
  rect 30x46 smd: 1(-45,29)
  rect 30x30 smd: 2(-45,-38) 3(45,-38) 4(45,38)
  silkscreen extent -23,-60 23,60, body extent -47,-60 51,58, height 41
SOT-23 [mm]
  rect 0.6x0.7 smd: 1(-0.95,-1) 2(0.95,-1) 3(0,1)
  silkscreen extent -1.6,-1.5 1.6,1.5, body extent -1.46,-1.27 1.46,1.27, height 0.95
TP [mm] "Test Point SMD 1mm"
  round 1 smd paste-0.457 mask+0.051: 1(0,0)
  silkscreen extent -0.74,-0.74 0.73,0.74

## Part data
AH1 AH2: library part "Aligment Hole M2", RefDes=RefDes
C1 C2: library part CAP, "47 µF ±20% 10V Ceramic Capacitor X5R 0805 (2012 Metric)", Manufacturer="Murata Electronics", Manufacturer P/N=GRM21BR61A476ME15L, Datasheet=https://search.murata.co.jp/Ceramy/image/img/A01X/G101/ENG/GRM21BR61A476ME15-01.pdf, Info=MLCC, RefDes=RefDes, Supplier=Digikey, Supplier P/N (Cut Tape)=490-9961-1-ND, Supplier P/N (Tape & Reel)=490-9961-2-ND, Supplier Web Page=https://www.digikey.com/en/products/detail/murata-electronics/GRM21BR61A476ME15L/4905529?s=N4IgTCBcDaIOICUCyYCMAhBA2VBBALAOxZICiqArADIgC6AvkA
C3 C5: library part CAP, "4.7 µF ±10% 50V Ceramic Capacitor X7R 0805 (2012 Metric)", Manufacturer="TDK Corporation", Manufacturer P/N=C2012X7R1H475K125AC, Datasheet=https://product.tdk.com/system/files/dam/doc/product/capacitor/ceramic/mlcc/catalog/mlcc_commercial_general_en.pdf, Info=MLCC, RefDes=RefDes, Supplier=Digikey, Supplier P/N (Cut Tape)=445-C2012X7R1H475K125ACCT-ND, Supplier P/N (Tape & Reel)=445-C2012X7R1H475K125ACTR-ND, Supplier Web Page=https://www.digikey.com/en/products/detail/tdk-corporation/C2012X7R1H475K125AC/10413507?s=N4IgTCBcDaIMJgAwEYwA0DsAlZAJALBgKwDSqRAgnCALoC%2BQA
C4 C6: library part CAP, "0.1 µF ±10% 100V Ceramic Capacitor X7R 0805 (2012 Metric)", Manufacturer="Murata Electronics", Manufacturer P/N=GCM21BR72A104KA37L, Datasheet=https://search.murata.co.jp/Ceramy/image/img/A01X/G101/ENG/GCM033R71A103KA03-01A.pdf, Info=MLCC, RefDes=RefDes, Supplier=Digikey, Supplier P/N (Cut Tape)=490-4789-1-ND, Supplier P/N (Tape & Reel)=490-4789-2-ND, Supplier Web Page=https://www.digikey.com/en/products/detail/murata-electronics/GCM21BR72A104KA37L/1641663?s=N4IgTCBcDaICwE4AMBaOB2AHAlA2FAcgCIgC6AvkA
C7: library part CAP, "1 µF ±5% 16V Ceramic Capacitor X7R 0805 (2012 Metric)", Manufacturer=KEMET, Manufacturer P/N=C0805C105J4RAC7800, Datasheet=https://connect.kemet.com:7667/gateway/IntelliData-ComponentDocumentation/1.0/download/datasheet/C0805C105J4RACTU, Info=MLCC, RefDes=RefDes, Supplier=Digikey, Supplier P/N (Cut Tape)=399-C0805C105J4RAC7800CT-ND, Supplier P/N (Tape & Reel)=399-C0805C105J4RAC7800TR-ND, Supplier Web Page=https://www.digikey.com/en/products/detail/kemet/C0805C105J4RAC7800/2211759?s=N4IgTCBcDaIMIAYAcCCscCMaBSAWASgIJwDsKCIAugL5A
C8: library part CAP, "2.2 µF ±5% 16V Ceramic Capacitor X7R 0805 (2012 Metric)", Manufacturer=KEMET, Manufacturer P/N=C0805C225J4REC7800, Datasheet=https://content.kemet.com/datasheets/KEM_C1090_X7R_ESD.pdf, Info=MLCC, RefDes=RefDes, Supplier=Digikey, Supplier P/N (Cut Tape)=399-C0805C225J4REC7800CT-ND, Supplier P/N (Tape & Reel)=399-C0805C225J4REC7800TR-ND, Supplier Web Page=https://www.digikey.com/en/products/detail/kemet/C0805C225J4REC7800/8643702?s=N4IgTCBcDaIMIAYAcCCscxlQKQCwCUBROAdhQRAF0BfIA
D1: library part "LED GREEN 0805", "Blue 470nm LED Indication - Discrete 3.2V 0805 (2012 Metric)", Manufacturer="Würth Elektronik", Manufacturer P/N=150080BS75000, Datasheet=https://www.we-online.com/components/products/datasheet/150080BS75000.pdf, Info="Id = 0.5 Inom (10mA)", RefDes=RefDes, Supplier=Digikey, Supplier P/N (Cut Tape)=732-4982-1-ND, Supplier P/N (Tape & Reel)=732-4982-2-ND, Supplier Web Page=https://www.digikey.com/en/products/detail/w%C3%BCrth-elektronik/150080BS75000/4489912
J1: "USB-C (USB TYPE-C) USB 3.2 Gen 2 (USB 3.1 Gen 2, Superspeed + (USB 3.1)) Receptacle Connector 24 Position Surface Mount, Right Angle; Through Hole", Manufacturer="Amphenol ICC", Datasheet=https://www.amphenol-cs.com/media/wysiwyg/files/drawing/12401598xxx2a.pdf, Info="USB Type-C SMD Receptacle", Manufacturer P/N=12401598E4#2A, RefDes=RefDes, Supplier=Digikey, Supplier P/N (Cut Tape)=12401598E4#2ACT-ND, Supplier P/N (Tape & Reel)=12401598E4#2ATR-ND, Supplier Web Page=https://www.digikey.com/en/products/detail/amphenol-icc-commercial-products/12401598e4-2a/6051823
J2: library part 691322110006, "6 Position Wire to Board Terminal Block Horizontal with Board 0.100\" (2.54mm) Through Hole", Manufacturer="Phoenix Contact", Manufacturer P/N=1725698, Datasheet=https://www.phoenixcontact.com/en-us/products/printed-circuit-board-terminal-mpt-05-6-254-1725698?type=pdf, Info="Borne 6pos 6A e=2,54", RefDes=RefDes, Supplier=Digikey, Supplier P/N (Cut Tape)=277-1277-ND, Supplier P/N (Tape & Reel)=277-1277-ND, Supplier Web Page=https://www.digikey.com/en/products/detail/phoenix-contact/1725698/267466
JP1 JP2 JP3 JP4: library part "Jumper 3", "3 Pin Jumper", Manufacturer="Würth Elektronik", Manufacturer P/N=61300311121, Datasheet=https://www.we-online.com/components/products/datasheet/61300311121.pdf, Info="0.1\" Pin header 1x3", RefDes=RefDes, Supplier=Digikey, Supplier P/N (Cut Tape)=732-5316-ND, Supplier P/N (Tape & Reel)=732-5316-ND, Supplier Web Page=https://www.digikey.com/en/products/detail/w%C3%BCrth-elektronik/61300311121/4846825
Q1 Q2: library part TR-NPN-BC817-SOT23, "Bipolar (BJT) Transistor NPN 80 V 100 mA 60MHz 225 mW Surface Mount SOT-23-3 (TO-236)", Manufacturer=onsemi, Datasheet=https://www.onsemi.com/pdf/datasheet/bss64lt1-d.pdf, Info="VCEsat max 200mV", Manufacturer P/N=BSS64LT1G, RefDes=RefDes, Supplier=Digikey, Supplier P/N (Cut Tape)=BSS64LT1GOSCT-ND, Supplier P/N (Tape & Reel)=BSS64LT1GOSTR-ND, Supplier Web Page=https://www.digikey.com/en/products/detail/onsemi/BSS64LT1G/1476267?s=N4IgTCBcDaIEIGUEDYAsAZAKgRgOIgF0BfIA
R1: library part RESISTOR, "180 Ohms ±1% 0.25W, 1/4W Chip Resistor 0805 (2012 Metric) Anti-Sulfur Thin Film", Manufacturer="Stackpole Electronics Inc", Manufacturer P/N=RNCP0805FTD180R, Datasheet=https://www.seielect.com/catalog/sei-rncp.pdf, Info="1% 100 PPM", RefDes=RefDes, Supplier=Digikey, Supplier P/N (Cut Tape)=RNCP0805FTD180RCT-ND, Supplier P/N (Tape & Reel)=RNCP0805FTD180RTR-ND, Supplier Web Page=https://www.digikey.com/en/products/detail/stackpole-electronics-inc/RNCP0805FTD180R/2240212
R2: library part RESISTOR, "21 kOhms ±1% 0.125W, 1/8W Chip Resistor 0805 (2012 Metric) Moisture Resistant Thick Film", Manufacturer=YAGEO, Manufacturer P/N=RC0805FR-0721KL, Datasheet=https://www.yageo.com/upload/media/product/products/datasheet/rchip/PYu-RC_Group_51_RoHS_L_12.pdf, Info="1% 100 PPM", RefDes=RefDes, Supplier=Digikey, Supplier P/N (Cut Tape)=311-21.0KCRCT-ND, Supplier P/N (Tape & Reel)=311-21.0KCRTR-ND, Supplier Web Page=https://www.digikey.com/en/products/detail/yageo/RC0805FR-0721KL/727728
R3: library part RESISTOR, "1.07 kOhms ±1% 0.125W, 1/8W Chip Resistor 0805 (2012 Metric) Automotive AEC-Q200 Thick Film", Manufacturer="Vishay Dale", Manufacturer P/N=CRCW08051K07FKEA, Datasheet=https://www.vishay.com/docs/20035/dcrcwe3.pdf, Info="1% 100 PPM", RefDes=RefDes, Supplier=Digikey, Supplier P/N (Cut Tape)=541-1.07KCCT-ND, Supplier P/N (Tape & Reel)=541-1.07KCTR-ND, Supplier Web Page=https://www.digikey.com/en/products/detail/vishay-dale/CRCW08051K07FKEA/1175640
R4: library part RESISTOR, "48.7 kOhms ±1% 0.125W, 1/8W Chip Resistor 0805 (2012 Metric) Moisture Resistant Thick Film", Manufacturer=YAGEO, Manufacturer P/N=RC0805FR-0748K7L, Datasheet=https://www.yageo.com/upload/media/product/products/datasheet/rchip/PYu-RC_Group_51_RoHS_L_12.pdf, Info="1% 100 PPM", RefDes=RefDes, Supplier=Digikey, Supplier P/N (Cut Tape)=311-48.7KCRCT-ND, Supplier P/N (Tape & Reel)=311-48.7KCRTR-ND, Supplier Web Page=https://www.digikey.com/en/products/detail/yageo/RC0805FR-0748K7L/727981
R5 R6: library part RESISTOR, "5.1 kOhms ±1% 0.125W, 1/8W Chip Resistor 0805 (2012 Metric) Moisture Resistant Thick Film", Manufacturer=YAGEO, Manufacturer P/N=RC0805FR-075K1L, Datasheet=https://www.yageo.com/upload/media/product/products/datasheet/rchip/PYu-RC_Group_51_RoHS_L_12.pdf, Info="1% 100 PPM", RefDes=RefDes, Supplier=Digikey, Supplier P/N (Cut Tape)=311-5.10KCRCT-ND, Supplier P/N (Tape & Reel)=311-5.10KCRTR-ND, Supplier Web Page=https://www.digikey.com/en/products/detail/yageo/RC0805FR-075K1L/727988
R7 R10: library part RESISTOR, "10 kOhms ±1% 0.125W, 1/8W Chip Resistor 0805 (2012 Metric) Automotive AEC-Q200 Thick Film", Manufacturer="Stackpole Electronics Inc", Manufacturer P/N=RMCF0805FT10K0, Datasheet=https://www.seielect.com/catalog/sei-rmcf_rmcp.pdf, Info="1% 100PPM", RefDes=RefDes, Supplier=Digikey, Supplier P/N (Cut Tape)=RMCF0805FT10K0CT-ND, Supplier P/N (Tape & Reel)=RMCF0805FT10K0TR-ND, Supplier Web Page=https://www.digikey.com/en/products/detail/stackpole-electronics-inc/RMCF0805FT10K0/1760676
T1: library part "USB EMI FILTER", "2 Line Common Mode Choke Surface Mount 90 Ohms @ 100 MHz 370mA DCR 300mOhm", Manufacturer="Würth Elektronik", Manufacturer P/N=744232090, Datasheet=https://www.we-online.com/components/products/datasheet/744232090.pdf, Info="EMI Trafo", RefDes=RefDes, Supplier=Digikey, Supplier P/N (Cut Tape)=732-1469-1-ND, Supplier P/N (Tape & Reel)=732-1469-2-ND, Supplier Web Page=https://www.digikey.com/en/products/detail/w%C3%BCrth-elektronik/744232090/1638873?s=N4IgTCBcDaIOwGYwFoCMAWAbATmZ5AcgCIgC6AvkA
TP2 TP3 TP4 TP5 TP6: library part TESTPOINT, RefDes=RefDes
U1: library part USB2.0_TVS_DIODES, "Clamp Ipp Tvs Diode Surface Mount SOT-143", Manufacturer="Diodes Incorporated", Manufacturer P/N=DRTR5V0U2SR-7, Datasheet=https://www.diodes.com/assets/Datasheets/DRTR5V0U2SR.pdf, Info="ESD Protection Device", RefDes=RefDes, Supplier=Digikey, Supplier P/N (Cut Tape)=DRTR5V0U2SR-7DICT-ND, Supplier P/N (Tape & Reel)=DRTR5V0U2SR-7DITR-ND, Supplier Web Page=https://www.digikey.com/en/products/detail/diodes-incorporated/DRTR5V0U2SR-7/4402528
U2: library part "CP2102N QFN28", "USB Bridge, USB to UART USB 2.0 UART Interface 28-QFN (5x5)", Manufacturer="Silicon Labs", Datasheet=https://www.silabs.com/documents/public/data-sheets/cp2102n-datasheet.pdf, Info=CP2102N-A02-GQFN28R, Manufacturer P/N=CP2102N-A02-GQFN28R, RefDes=RefDes, Supplier=Digikey, Supplier P/N (Cut Tape)=336-5890-1-ND, Supplier P/N (Tape & Reel)=336-5890-2-ND, Supplier Web Page=https://www.digikey.com/en/products/detail/silicon-labs/CP2102N-A02-GQFN28R/9863480
U3: library part RT9080-33GJ5, "Linear Voltage Regulator IC Positive Fixed 1 Output 600mA TSOT-23-5", Manufacturer="Richtek USA Inc.", Datasheet=https://www.richtek.com/assets/product_file/RT9080/DS9080-05.pdf, Info="3.3V 600mA PMIC", Manufacturer P/N=RT9080-33GJ5, RefDes=RefDes, Supplier=Digikey, Supplier P/N (Cut Tape)=1028-1509-1-ND, Supplier P/N (Tape & Reel)=1028-1509-2-ND, Supplier Web Page=https://www.digikey.com/en/products/detail/richtek-usa-inc/RT9080-33GJ5/6161634?s=N4IgTCBcDaIEoBUCcAGAHCgtAZmwcQCkBWEAXQF8g

## Via types
v1: diameter 27.56, hole 15.75, Top Layer to Bottom Layer, tented both sides, 39 vias
v2: diameter 19.68, hole 7.87, Top Layer to Bottom Layer, tented both sides, 9 vias
v3: diameter 13.78, hole 7.87, Top Layer to Bottom Layer, tented both sides, 5 vias

## Nets (pads, with @x,y where several pads share a name; then routed paths per layer and width w, separated by ;. In a path a pad name is that pad's centre, name@x,y a point inside that pad or via, vN(x,y) a via of type N, cw(c..) or ccw(c..) an arc to the next point about the centre after c; other vN are vias at no path point)
#RST: R3.2 TP6.1 U2.9 | length 428.2
  Top Layer w10: R3.2 1909.76,2823.51 2024.5,2823.51 2049.78,2848.79 2049.78,2990.78 2034.92,3005.64 2034.92,3026.5 U2.9
  Bottom Layer w10: TP6.1 1923.13,2826.87 1943.67,2826.87 v1(1947.03,2823.51)
+3.3V: C8.1 JP1.3 TP3.1 U3.5 | length 391.8
  Top Layer w18: U3.5 2245.08,2841.68 2248.87,2845.47 C8.1 2330.12,2845.47 2350.04,2825.55 JP1.3
  Bottom Layer w10: TP3.1 2378.62,2828.62 2495.04,2828.62 JP1.3
BOOT: JP2.1 Q2.3 | length 474.8
  Top Layer w10: Q2.3 2305.51,3051.18 2396.4,3142.07 2396.4,3207.48 2479.47,3290.55 2563.11,3290.55 JP2.1
BOOT.CTS: J2.2 JP2.2 | length 666.3
  Top Layer w10: JP2.2 2623.24,3240.43 2853.12,3240.43 3153,2940.55 J2.2
CP2102VDD: C5.1 C6.1 R3.1 TP5.1 U2.6 | length 656.2
  Top Layer w10: C6.1 1680.12,2881.89 C5.1@1754.84,2881.89 ; R3.1 1835.63,2841.54 1807.01,2870.16 1772.56,2870.16 C5.1 C5.1@1754.84,2881.89 ; U2.6 1953.74,3078.74 1908.62,3033.62 1753.62,3033.62 1741.8,3021.8 v1(1741.8,2953.21) 1741.8,2893.62 1753.53,2881.89 C5.1@1754.84,2881.89
  Bottom Layer w10: TP5.1 1683.78,2953.88 1741.12,2953.88 v1(1741.8,2953.21)
CTS: JP2.3 U2.23 | length 571.7
  Top Layer w10: U2.23@2113.66,3224.33 2118.35,3229.02 2118.35,3230.59 2152.76,3265 v1(2185,3265)
  Bottom Layer w10: v1(2185,3265) 2358.63,3265 2423.08,3200.55 2563.11,3200.55 JP2.3
DE_N: J1.A7 J1.B7 T1.1 U1.2 | length 424.9
  Top Layer w9: J1.B7 1387.91,3110.12 1409.1,3110.12 v3(1409.22,3110) ; v3(1434.66,3080.55) 1434.74,3080.63 1454.64,3080.63 J1.A7 1456.13,3082.11 1475.22,3082.11 1476.91,3083.8 1554.71,3083.8 1555.1,3083.4 1706.58,3083.4 1741.42,3118.25 1754.15,3118.25 1759.42,3112.97 1759.42,3112.63 1766.73,3105.32 T1.1
  Bottom Layer w9: v3(1409.22,3110) 1410.13,3109.08 1410.13,3105.08 v3(1434.66,3080.55)
DE_P: J1.A6 J1.B6 T1.4 U1.3 | length 414.3
  Top Layer w9: J1.B6 1417.04,3090.55 1426.88,3100.39 J1.A6 1456.13,3098.99 1475.22,3098.99 1476.91,3097.3 1560.3,3097.3 1560.69,3096.91 1700.98,3096.91 1735.83,3131.75 1754.15,3131.75 1759.42,3137.03 1759.42,3137.37 1766.73,3144.68 T1.4
DI_N: T1.2 U2.5 | length 113.6
  Top Layer w9: T1.2 1892.72,3105.32 1900.03,3112.63 1900.03,3112.97 1905.3,3118.25 1922.03,3118.25 1938.76,3101.51 1958.46,3101.51 1961.39,3098.59 1982.52,3098.59 U2.5
DI_P: T1.3 U2.4 | length 113.6
  Top Layer w9: T1.3 1892.72,3144.68 1900.03,3137.37 1900.03,3137.03 1905.3,3131.75 1927.62,3131.75 1944.35,3115.02 1958.46,3115.02 1961.39,3117.95 1982.52,3117.95 U2.4
DTR: Q2.2 R7.2 TP2.1 U2.28 | length 877.3
  Top Layer w10: U2.28 2015.16,3292.79 2046.15,3323.78 2094.33,3323.78 R7.2 ; R7.2@2100.68,3330.13 2100.68,3370.68 2106.54,3376.54 2202.46,3376.54 2278.21,3300.79 2278.21,3261.19 2321.42,3217.98 2321.42,3127.75 2279.76,3086.09 2279.76,3066.77 2226.77,3013.78 Q2.2
  Bottom Layer w10: v1(2230,3349) 2230.5,3349.5 2324.5,3349.5 TP2.1
ENA: JP3.1 Q1.3 | length 223.5
  Top Layer w10: Q1.3 2428.15,3275.59 JP3.1
ENA.RTS.485: J2.3 JP3.2 | length 782.2
  Top Layer w10: JP3.2 2501.53,3248.97 2557.89,3248.97 2599.47,3290.55 2644.45,3290.55 2679.57,3255.43 2938.12,3255.43 3153,3040.55 J2.3
GND: C1.2 C2.2 C3.2 C4.2 C5.2 C6.2 C7.2 C8.2 J1.A1 J1.A12 J1.B1 J1.B12 J2.6 R1.2 R4.2 R5.2 R6.2 U1.1 U2.3 U2.29 U3.2 | length 942.8
  Top Layer w10: J1.B1 1416.79,2992.13 1425.94,2982.97 1454.04,2982.97 J1.A12 v1(1496.06,2982.28) ; J1.B12 1388.7,3207.76 1402.84,3207.76 1411.09,3199.51 1454.04,3199.51 J1.A1 v1(1486.22,3198.82) ; v1(1549.69,3044.38) 1593.92,3044.38 U1.1 ; R6.2 1582.05,3288.44 v1(1582.05,3238.67) ; R5.2 v1(1618.11,2925.55) ; v1(1631.89,2812.99) 1678.15,2812.99 C6.2 1680.12,2812.99 C5.2 ; C1.2 1650.59,3302.17 v1(1650.59,3339.57) ; v1(1726.38,3338.58) 1726.38,3299.21 C2.2 ; C4.2 1804.13,2937.99 1821.47,2920.66 1821.47,2909.45 v1(1824.83,2906.09) ; C3.2 1892.72,2937.99 1918.31,2912.4 1926.06,2912.4 1931.06,2907.4 1941.42,2907.4 1953.15,2895.67 R4.2 ; v1(1892.72,3187.99) R1.2 ; v1(1940,3160) 1944.29,3160 1961.73,3142.56 1963.31,3142.56 1968.07,3137.8 U2.3 ; v1(2098.11,2812.55) 2098.11,2852.64 C7.2 ; v1(2208.07,2887.8) U3.2 ; v1(2315,2950) 2315,2916.69 C8.2
  other v1: 1921.26,2912.4 1965,3290 1990,3355 2055,3355 2267,3383 2357,3385
  other v2: 2030.91,3074.8 2074.21,3074.8 2117.52,3074.8 2030.91,3118.11 2074.21,3118.11 2117.52,3118.11 2030.91,3161.42 2074.21,3161.42 2117.52,3161.42
NetD1_K: D1.K R1.1 | length 80.9
  Top Layer w10: D1.K 1812.07,3296.87 1892.34,3296.87 R1.1
NetJ1_A5: J1.A5 R6.1 | length 219.7
  Top Layer w10: J1.A5 1455.63,3119.17 1475.02,3119.17 1475.43,3118.77 1495.95,3118.77 1511.26,3134.07 R6.1
NetJ1_B5: J1.B5 R5.1 | length 232.9
  Top Layer w10: J1.B5 1387.94,3070.72 1407.88,3070.72 v3(1408.03,3070.57) ; v1(1473.11,2925.55) R5.1
  Bottom Layer w10: v3(1408.03,3070.57) 1408.03,3036.69 1473.11,2971.61 v1(1473.11,2925.55)
NetQ1_1: Q1.1 R7.1 | length 67
  Top Layer w10: R7.1 2169.45,3322.09 2178.54,3312.99 Q1.1
NetQ2_1: Q2.1 R10.1 | length 118.6
  Top Layer w10: Q2.1 2253.58,3088.58 2282.95,3117.95 2282.95,3149.69 R10.1
PWR: J2.1 JP1.2 | length 695.2
  Top Layer w18: JP1.2 2508.06,2915.6 2558.76,2915.6 2597.81,2876.55 2841.65,2876.55 2854.17,2864.03 3134.63,2864.03 J2.1
RS485: JP4.3 U2.17 | length 598.4
  Top Layer w10: U2.17@2180.43,3098.35 2185.12,3093.66 2186.69,3093.66 2201.02,3079.33 2201.02,2997.83 2225.07,2973.78 2386.24,2973.78 2479.47,2880.55 2563.11,2880.55 JP4.3
RTS: JP4.1 Q1.2 R10.2 U2.24 | length 898.1
  Top Layer w10: U2.24@2093.9,3224.33 2093.9,3251.18 2105.68,3262.96 v1(2105.68,3267.71) 2126.75,3288.78 2194.85,3288.78 2218.63,3265 2218.63,3244.36 Q1.2 ; Q1.2@2224.8,3237.2 2224.8,3162.4 R10.2
  Bottom Layer w10: v1(2105.68,3267.71) 2148.66,3267.71 2161.22,3255.15 2230.82,3185.55 2330.37,3086 2557.66,3086 JP4.1
RTS.485: JP3.3 JP4.2 | length 269.7
  Top Layer w10: JP3.3 2557.66,3086 2557.66,2986 JP4.2
RXD: J2.5 U2.26 | length 1297.1
  Top Layer w10: U2.26 2054.53,3248.53 2049.21,3253.85 2049.21,3288.46 2056,3295.25 v1(2056,3300)
  Bottom Layer w10: v1(2056,3300) 2056.07,3300 2076.39,3320.31 2337.3,3320.31 2407.53,3390.55 2688.29,3390.55 2838.29,3240.55 J2.5
TXD: J2.4 U2.25 | length 1223
  Top Layer w10: v1(2072.99,3268.2) 2074.13,3267.06 2074.13,3209.72 U2.25
  Bottom Layer w10: v1(2072.99,3268.2) 2072.99,3268.65 2098.38,3294.04 2513.26,3294.04 2558.4,3248.91 2558.4,3241.63 2603.53,3196.49 3102.17,3196.49 J2.4
USENSE: R2.2 R4.1 TP4.1 U2.8 | length 215.5
  Top Layer w6: v1(1990.56,3015.19) 1992.65,3015.19 2004.04,3026.57 U2.8
  Top Layer w10: U2.8 2015.16,2976.38 2022.64,2968.9 2022.64,2883.46 R4.1
  Bottom Layer w6: v1(1990.56,3015.19) 1994.69,3011.06 1994.69,2986.61 TP4.1
VBUS: C1.1 C2.1 C3.1 C4.1 C7.1 D1.A J1.A4 J1.A9 J1.B4 J1.B9 JP1.1 R2.1 U1.4 U2.7 U3.1 U3.3 | length 795.3
  Top Layer w10: J1.B9 1416.79,3149.61 1425.94,3140.45 1454.04,3140.45 J1.A4 1455.63,3140.67 1482.81,3140.67 v1(1485.69,3143.55) ; C4.1 C3.1@1865.55,3006.89 ; C3.1@1878.35,3008.46 1865.55,3008.46 1875.71,3018.62 1924.63,3018.62 1937.57,3031.56 v1(1942.32,3031.56) 1942.32,3033.3 1968.07,3059.06 U2.7 ; C3.1 1892.72,3006.89 1918.59,2981.02 1941.42,2981.02 1953.15,2969.28 R2.1
  Top Layer w11.81: J1.B4 1421.84,3051.18 1430.79,3042.23 1431.86,3042.23 1432.75,3041.34 1484.4,3041.34 1489.74,3036 v1(1494,3036)
  Top Layer w20: U1.4 1585.57,3135.03 1585.57,3165.03 v1(1585.74,3165.2) ; C1.1 1645.94,3228.08 1645.94,3197.28 v1(1646.21,3197.01) ; v1(1727.88,3197.58) 1728.12,3197.81 1728.12,3228.12 C2.1 ; D1.A 1812.5,3226.32 1812.5,3191.77 v1(1813,3191.28) ; C7.1 v1(2100.79,2962.6) ; v1(2170,2895) 2170.53,2895.53 2170.53,2936.48 U3.3 ; v1(2245,2895) v1(2245,2895) 2245.04,2936.97 U3.1
  other v3: 1431.32,3042.23 1415,3150
pads on no net: AH1.1 AH2.1 J1. J1.A2 J1.A3 J1.A8 J1.A10 J1.A11 J1.B2 J1.B3 J1.B8 J1.B10 J1.B11 J1.SH1 J1.SH2 J1.SH3 J1.SH4 U2.1 U2.2 U2.10 U2.11 U2.12 U2.13 U2.14 U2.15 U2.16 U2.18 U2.19 U2.20 U2.21 U2.22 U2.27 U3.4

## Polygon pours and split planes (outlines as drawn)
GND on Top Layer "GND_L01_P000" (solid, remove dead copper, pour order 0): 1084.25,2760.55 1084.25,3412.55 3293.11,3412.55 3293.11,2760.55
VBUS on Bottom Layer "VBUS_L02_P001" (solid, pour order 1): 1425.15,3127.85 1407,3146 1407,3154 1416,3163 1485,3163 1538,3216 1609,3216 1643,3250 2170,3250 2319.45,3100.55 2320,3100.55 2565,3100.55 2565,2855 2015,2855 1895,2975 1540,2975 1494,3021 1441,3021 1423,3039 1423,3046 1428,3051 1505,3051 1532.34,3023.66 1905.66,3023.66 1933,3051 2145,3051 2145,3182 1979.96,3182 1951.96,3210 1878.06,3210 1843.06,3175 1692.1,3175 1662.1,3145 1610,3145 1510.56,3144.44 1493.97,3127.85
GND on Bottom Layer "GND_L02_P002" (solid, remove dead copper, pour order 2): 1084.25,2760.55 1084.25,3412.55 3293.11,3412.55 3293.11,2760.55

## Other copper
Top Layer:
  rectangle net DE_N: 1646.41,3029.87 1676.41,3086.41
  region net DE_P: 1676.41,3149.87 1646.41,3149.87 1646.41,3094.06 1676.41,3094.06
  pour cut-out: 1742.71,3165 1916.6,3165 1916.6,3085.09 1742.71,3085.09

## Silkscreen, mask and mechanical layers (free items; w line width, h text height)
Top Overlay:
  drawing of 7 lines, arcs and shapes, not listed
  text "ESP32 / UART" at 1127.11,3362.99 h26
  text "EPB HW ME" at 1127.11,3301.55 h30
  text "RXD" at 2933.45,3227.56 h26
  text "TXD" at 2933.45,3132.56 h26
  text "ENA/RTS/485" at 2739.49,3027.56 h26
  text "BOOT/CTS" at 2818.48,2927.56 h26
  text "PWR" at 2948.42,2817.56 h26
  text "V.1.0" at 1136.8,2792.12 h26
Board:
  the board outline again, w3.94
Drill Drawing:
  drawing of 317 lines, arcs and shapes, not listed
  text "Layer" at 1077.5,7229.99 h60
  text "Name" at 1487.41,7229.99 h60
  text "Material" at 2817.03,7229.99 h60
  text "Thickness" at 3416.88,7229.99 h60
  text "Constant" at 4066.71,7229.99 h60
  text "Board Layer Stack" at 4636.58,7229.99 h60
  text "Top Overlay" at 1487.41,7109.99 h60
  text "Top Solder" at 1487.41,6989.99 h60
  text "SM-001" at 2817.03,6989.99 h60
  text "0,025mm" at 3416.88,6989.99 h60
  text "4" at 4066.71,6989.99 h60
  text "Top Surface Finish" at 1487.41,6869.99 h60
  text "PbSn" at 2817.03,6869.99 h60
  text "0,020mm" at 3416.88,6869.99 h60
  text "1" at 1077.5,6749.99 h60
  text "Top Layer" at 1487.41,6749.99 h60
  text "CF-004" at 2817.03,6749.99 h60
  text "0,035mm" at 3416.88,6749.99 h60
  text "Dielectric 1" at 1487.41,6629.99 h60
  text "Core-042" at 2817.03,6629.99 h60
  text "0,991mm" at 3416.88,6629.99 h60
  text "4.6" at 4066.71,6629.99 h60
  text "2" at 1077.5,6509.99 h60
  text "Bottom Layer" at 1487.41,6509.99 h60
  text "CF-004" at 2817.03,6509.99 h60
  text "0,035mm" at 3416.88,6509.99 h60
  text "Bottom Surface Finish" at 1487.41,6389.99 h60
  text "PbSn" at 2817.03,6389.99 h60
  text "0,020mm" at 3416.88,6389.99 h60
  text "Bottom Solder" at 1487.41,6269.99 h60
  text "SM-001" at 2817.03,6269.99 h60
  text "0,025mm" at 3416.88,6269.99 h60
  text "4" at 4066.71,6269.99 h60
  text "Bottom Overlay" at 1487.41,6149.99 h60
  text "Total board thickness:" at 1077.5,6029.99 h60
  text "1,151mm" at 3416.88,6029.99 h60
  text "Symbol" at 1097.5,5378.94 h72
  text "Count" at 1603.38,5378.94 h72
  text "Hole Size" at 2143.24,5378.94 h72
  text "Plated" at 3262.91,5378.94 h72
  text "Hole Type" at 3768.79,5378.94 h72
  text "Drill Layer Pair" at 4502.59,5378.94 h72
  text "Via/Pad" at 6002.14,5378.94 h72
  text "Pad Shape" at 6591.99,5378.94 h72
  text "Template" at 7337.78,5378.94 h72
  text "1" at 1603.38,5228.94 h60
  text "0,650mm (25,59mil)" at 2143.24,5228.94 h60
  text "NPTH" at 3262.91,5228.94 h60
  text "Round" at 3768.79,5228.94 h60
  text "Top Layer - Bottom Layer" at 4502.59,5228.94 h60
  text "Pad" at 6002.14,5228.94 h60
  text "Rounded" at 6591.99,5228.94 h60
  text "c65hn65" at 7337.78,5228.94 h60
  text "1" at 1603.38,5078.94 h60
  text "0,650mm (25,59mil)" at 2143.24,5078.94 h60
  text "NPTH" at 3262.91,5078.94 h60
  text "Slot" at 3768.79,5078.94 h60
  text "Top Layer - Bottom Layer" at 4502.59,5078.94 h60
  text "Pad" at 6002.14,5078.94 h60
  text "Rounded" at 6591.99,5078.94 h60
  text "r95_65hn65_95r32" at 7337.78,5078.94 h60
  text "2" at 1603.38,4928.94 h60
  text "2,000mm (78,74mil)" at 2143.24,4928.94 h60
  text "NPTH" at 3262.91,4928.94 h60
  text "Round" at 3768.79,4928.94 h60
  text "Top Layer - Bottom Layer" at 4502.59,4928.94 h60
  text "Pad" at 6002.14,4928.94 h60
  text "Rounded" at 6591.99,4928.94 h60
  text "c200hn200" at 7337.78,4928.94 h60
  text "4" at 1603.38,4778.94 h60
  text "0,500mm (19,69mil)" at 2143.24,4778.94 h60
  text "PTH" at 3262.91,4778.94 h60
  text "Slot" at 3768.79,4778.94 h60
  text "Top Layer - Bottom Layer" at 4502.59,4778.94 h60
  text "Pad" at 6002.14,4778.94 h60
  text "Rounded" at 6591.99,4778.94 h60
  text "r140_80h50_110r40m150_90p0" at 7337.78,4778.94 h60
  text "6" at 1603.38,4628.94 h60
  text "1,100mm (43,31mil)" at 2143.24,4628.94 h60
  text "PTH" at 3262.91,4628.94 h60
  text "Round" at 3768.79,4628.94 h60
  text "Top Layer - Bottom Layer" at 4502.59,4628.94 h60
  text "Pad" at 6002.14,4628.94 h60
  text "(Mixed)" at 6591.99,4628.94 h60
  text "(Mixed)" at 7337.78,4628.94 h60
  text "12" at 1603.38,4478.94 h60
  text "1,092mm (43,00mil)" at 2143.24,4478.94 h60
  text "PTH" at 3262.91,4478.94 h60
  text "Round" at 3768.79,4478.94 h60
  text "Top Layer - Bottom Layer" at 4502.59,4478.94 h60
  text "Pad" at 6002.14,4478.94 h60
  text "(Mixed)" at 6591.99,4478.94 h60
  text "(Mixed)" at 7337.78,4478.94 h60
  text "14" at 1603.38,4328.94 h60
  text "0,200mm (7,87mil)" at 2143.24,4328.94 h60
  text "PTH" at 3262.91,4328.94 h60
  text "Round" at 3768.79,4328.94 h60
  text "Top Layer - Bottom Layer" at 4502.59,4328.94 h60
  text "Via" at 6002.14,4328.94 h60
  text "Rounded" at 6591.99,4328.94 h60
  text "(Mixed)" at 7337.78,4328.94 h60
  text "39" at 1603.38,4178.94 h60
  text "0,400mm (15,75mil)" at 2143.24,4178.94 h60
  text "PTH" at 3262.91,4178.94 h60
  text "Round" at 3768.79,4178.94 h60
  text "Top Layer - Bottom Layer" at 4502.59,4178.94 h60
  text "Via" at 6002.14,4178.94 h60
  text "Rounded" at 6591.99,4178.94 h60
  text "v70h40" at 7337.78,4178.94 h60
  text "79 Total" at 1603.38,4028.94 h60
  text "Slot definitions :" at 1097.5,3883.97 h60
  text "Routed Path Length" at 2130.19,3883.97 h60
  text "= Calculated from tool start centre position to tool end centre position." at 3232.86,3883.97 h60
  text "Hole Length" at 2130.19,3783.99 h60
  text "= Routed Path Length + Tool Size = Slot length as defined in the PCB layout" at 2822.99,3783.99 h60

## Dimensions
1084.25,3413.55 to 3294.11,3413.55 on Board
1084.25,3413.55 to 1084.25,2760.55 on Board

## Text inside footprints (layer, text, board x,y; h text height)
JP1: Top Overlay "+3.3V" at 2398.11,2890.55 h26 r270; Top Overlay "VBUS" at 2398.11,3070.55 h26 r270
JP2: Top Overlay "CTS" at 2688.11,3160.55 h26 r270; Top Overlay "BOOT" at 2688.11,3395.55 h26 r270
JP3: Top Overlay "ENA" at 2403.11,3395.55 h26 r270; Top Overlay "RTS/485" at 2398.11,3245.55 h26 r270
JP4: Top Overlay "485" at 2688.11,2850.55 h26 r270; Top Overlay "RTS" at 2688.11,3070.55 h26 r270